# Altium PCB klor1_4.PcbDoc (part 2 of 3)
Units mm, origin at the board's own origin, x right, y up, seen from the top; angles counter-clockwise.
Board outline 323.11 x 118.19 mm, 2 copper layers (Top Layer, Bottom Layer); 176 components, 136 nets, 856 pads, 194 vias.
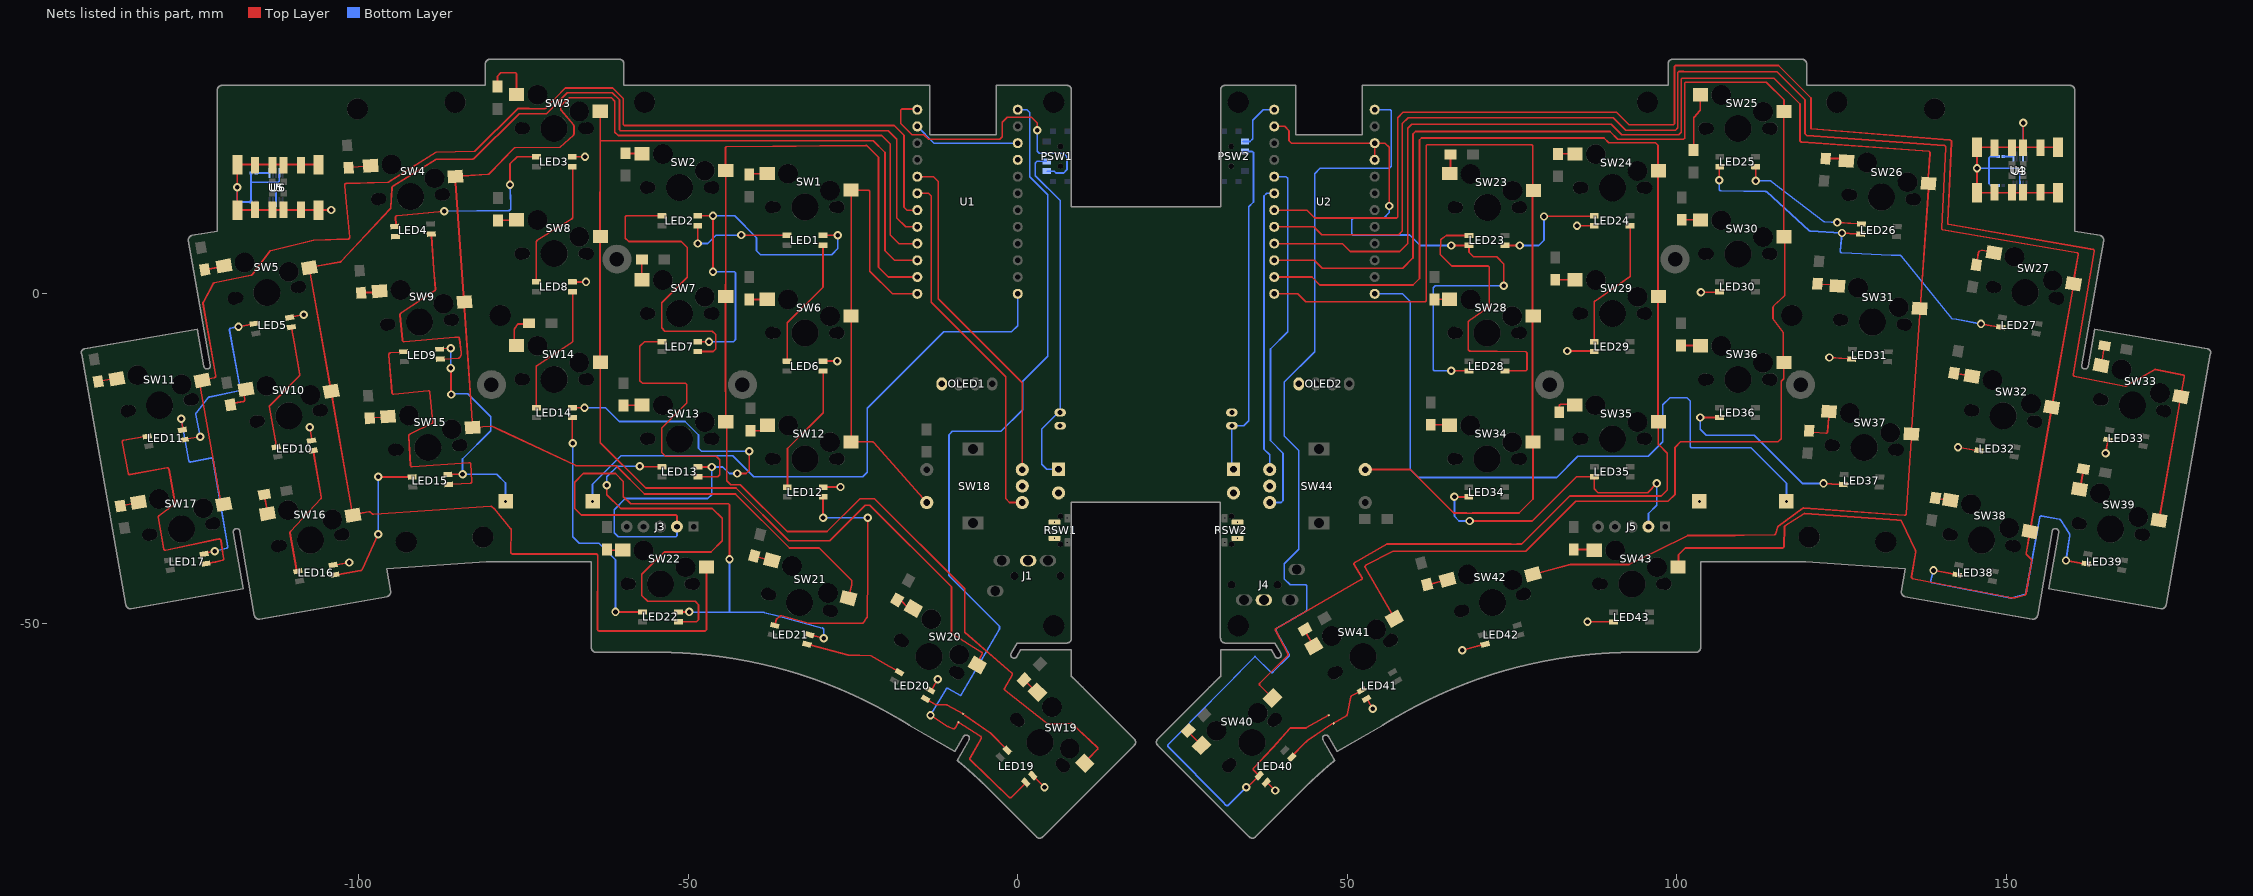
[diagram p2: the nets of this part, all layers, seen from the top]

## Via types
v1: diameter 1.27, hole 0.711, Top Layer to Bottom Layer, 194 vias

## Nets (pads, with @x,y where several pads share a name; then routed paths per layer and width w, separated by ;. In a path a pad name is that pad's centre, name@x,y a point inside that pad or via, vN(x,y) a via of type N, cw(c..) or ccw(c..) an arc to the next point about the centre after c; other vN are vias at no path point)
+BATT: PSW1.3 U1.24 | length 43.9
  Top Layer w0.254: U1.24@-15.24,27.94 -15.33,28.03 -17.591,28.03 -17.74,27.881 -17.74,25.83 -16.04,24.13 -14.24,24.13 -13.54,23.43 -2.74,23.43 -2.34,23.83 -2.34,26.03 -1.573,26.797 2.093,26.797 2.96,25.93 v1(2.96,24.83)
  Bottom Layer w0.254: v1(2.96,24.83) 2.96,21.63 3.26,21.33 6.96,21.33 7.46,20.83 7.46,18.83 6.96,18.33 5.808,18.33 5.534,18.604 PSW1.3@4.404,18.604
+BATT_L: PSW2.3 U2.24 | length 8.4
  Bottom Layer w0.254: PSW2.3@34.191,23.104 35.234,23.104 35.66,23.53 35.66,26.33 37.27,27.94 U2.24@38.92,27.94
AUDIO: BZ1.1 U1.12 | length 90.3
  Bottom Layer w0.254: BZ1.1@-64.515,-31.51 -64.515,-28.895 -60.19,-24.57 -43.24,-24.57 -40.04,-27.77 -23.54,-27.77 -22.84,-27.07 -22.84,-17.37 -11.24,-5.77 -0.94,-5.77 0,-4.83 U1.12@0,0
AUDIO_L: BZ2.1 U2.12 | length 109.5
  Bottom Layer w0.254: U2.12@54.16,0 58.39,0 59.56,-1.17 59.56,-26.67 60.76,-27.87 81.76,-27.87 84.96,-24.67 95.66,-24.67 97.873,-22.457 97.873,-16.857 98.96,-15.77 101.56,-15.77 102.052,-16.262 102.052,-23.229 102.201,-23.378 111.268,-23.378 116.635,-28.745 BZ2.1@116.635,-31.51
col0: SW11.1 SW17.1 U1.18 | length 175.1
  Top Layer w0.254: -123.625,-1.456 cw(c-123.375,-1.412) -123.599,-1.293 -122.096,1.525 cw(c-121.872,1.405) -121.923,1.654 -116.333,2.811 ccw(c-116.385,3.059) -116.183,2.906 -113.495,6.458 cw(c-113.292,6.304) -113.352,6.551 -106.865,8.124 ; -123.625,-1.456 -121.684,-12.42 cw(c-121.934,-12.464) -121.89,-12.714 ; -121.89,-12.714 -122.761,-12.868 SW11.1@-123.749,-13.154 -124.019,-14.088 -121.008,-31.162 SW17.1@-120.968,-31.425 ; -106.865,8.124 cw(c-106.805,7.877) -106.814,8.131 -101.61,8.32 ; -101.609,8.32 ccw(c-101.619,8.574) -101.366,8.599 -101.883,13.892 -102.139,16.417 cw(c-101.886,16.443) -102.14,16.443 -102.14,16.483 cw(c-101.886,16.483) -101.894,16.737 -95.511,16.928 -88.272,21.48 -82.484,21.643 -82.384,21.646 -75.874,28.057 -75.8,28.13 -74.14,28.13 -72.265,28.09 ; -72.264,28.091 -71.743,28.121 ; -71.742,28.121 ccw(c-71.757,28.374) -71.575,28.197 -68.64,31.236 -65.14,31.23 -61.44,31.23 -59.84,29.63 -59.84,25.679 -59.691,25.53 -18.74,25.53 -17.262,24.052 -17.262,13.152 -16.81,12.7 U1.18@-15.24,12.7
col0_L: SW33.1 SW39.1 U2.18 | length 229.7
  Top Layer w0.254: U2.18@38.92,12.7 43.89,12.7 45.086,11.504 57.511,11.504 57.66,11.653 57.66,26.73 58.46,27.53 90.86,27.53 92.76,25.63 99.511,25.63 99.66,25.779 99.66,34.481 99.809,34.63 115.432,34.63 120.36,29.702 120.36,25.064 141.445,23.331 141.538,23.324 141.678,23.183 141.678,23.072 141.088,10.79 141.088,10.783 141.088,10.778 141.088,10.672 141.163,10.598 141.219,10.541 163.213,6.734 163.344,6.603 163.344,6.476 163.341,6.455 160.157,-12.25 160.157,-12.376 160.286,-12.505 167.972,-14.025 167.997,-14.025 168.064,-14.025 168.122,-13.991 172.478,-11.517 cw(c172.603,-11.738) 172.652,-11.488 ; 172.653,-11.489 176.817,-12.321 cw(c176.767,-12.57) 177.017,-12.614 ; SW39.1@173.177,-34.385 173.327,-33.525 176.337,-16.45 SW33.1@176.457,-15.585 176.644,-14.731 177.017,-12.614
col1: SW5.1 SW10.1 SW16.1 SW22.1 U1.17 | length 240.8
  Top Layer w0.254: -102.823,4.815 -106.493,4.168 SW5.1@-107.489,3.926 -107.35,3.064 -104.215,-14.717 -101.031,-32.774 SW16.1@-100.879,-33.634 -99.892,-33.344 -98.453,-33.09 cw(c-98.409,-33.34) -98.25,-33.142 -97.917,-33.408 ccw(c-97.759,-33.21) -97.741,-33.463 -79.986,-32.222 ; -102.823,4.815 ccw(c-102.868,5.065) -102.683,4.891 -95.192,12.895 ; -95.192,12.896 ccw(c-95.378,13.069) -95.124,13.054 -94.947,16.107 cw(c-94.694,16.092) -94.839,16.301 -88.24,20.43 -82.744,20.43 ccw(c-82.744,20.684) -82.566,20.503 -75.634,27.33 -71.496,27.33 -71.422,27.404 ccw(c-71.602,27.584) -71.421,27.405 -68.455,30.453 cw(c-68.273,30.276) -68.453,30.456 -68.378,30.53 -61.54,30.53 -60.44,29.43 -60.44,24.879 -60.291,24.73 -19.64,24.73 -18.34,23.43 -18.34,11.49 -17.01,10.16 U1.17@-15.24,10.16 ; -79.986,-32.222 cw(c-79.969,-32.475) -79.806,-32.28 -79.432,-32.591 -76.9,-35.697 cw(c-77.096,-35.857) -76.843,-35.863 -76.933,-39.209 ccw(c-76.679,-39.216) -76.679,-39.47 -63.994,-39.47 ; -63.994,-39.47 cw(c-63.994,-39.724) -63.74,-39.724 -63.76,-50.465 ; -63.76,-50.47 -63.755,-50.918 -63.755,-50.97 ccw(c-63.506,-50.918) -63.561,-51.166 -47.436,-51.166 -47.239,-50.969 SW22.1@-47.239,-41.436
col1_L: SW27.1 SW32.1 SW38.1 SW43.1 U2.17 | length 289
  Top Layer w0.254: U2.17@38.92,10.16 44.93,10.16 46.126,8.964 57.794,8.964 58.36,9.53 58.36,25.83 59.26,26.73 90.36,26.73 92.26,24.83 99.811,24.83 100.168,25.187 100.168,33.581 100.317,33.73 101.06,33.73 115.241,33.649 119.46,29.43 119.46,24.292 119.589,24.163 119.731,24.022 140.563,22.505 140.658,22.498 140.799,22.357 140.799,22.245 140.194,9.968 140.193,9.962 140.193,9.851 140.325,9.719 160.783,6.233 160.915,6.102 160.915,5.974 160.911,5.953 160.279,2.367 SW27.1@160.197,1.495 160.057,0.633 156.928,-17.114 154.342,-31.778 154.341,-31.784 153.738,-35.205 SW38.1@153.587,-36.065 153.435,-36.924 153.001,-39.384 153.001,-39.511 153.768,-40.278 cw(c153.588,-40.457) 153.838,-40.498 152.987,-45.511 cw(c152.737,-45.468) 152.806,-45.713 ; SW43.1@100.165,-41.41 100.26,-40.537 100.26,-39.57 101.26,-38.57 116.012,-38.57 ccw(c116.012,-38.316) 116.266,-38.323 ; 116.266,-38.323 116.341,-35.392 116.344,-35.291 116.435,-35.2 119.277,-33.384 119.34,-33.344 119.423,-33.344 133.357,-34.316 134.057,-34.365 136.226,-38.998 cw(c135.996,-39.106) 136.247,-39.148 135.602,-42.926 ; 135.602,-42.927 ccw(c135.852,-42.968) 135.803,-43.218 150.351,-46.068 ; 150.352,-46.069 ccw(c150.4,-45.819) 150.369,-46.071 151.11,-46.164 ccw(c151.141,-45.912) 151.208,-46.157 152.805,-45.713
col2: SW4.1 SW9.1 SW15.1 SW21.1 U1.16 | length 207
  Top Layer w0.254: -68.113,29.663 -69.258,28.605 ccw(c-69.086,28.419) -69.34,28.419 -69.34,28.022 ccw(c-69.086,28.022) -69.281,27.859 -67.399,25.601 cw(c-67.594,25.438) -67.34,25.438 -67.34,24.242 cw(c-67.594,24.242) -67.422,24.055 ; -68.113,29.663 cw(c-67.941,29.476) -67.941,29.73 -61.64,29.73 -61.14,29.23 -61.14,24.53 -60.64,24.03 -20.64,24.03 -19.34,22.73 -19.34,8.93 -18.03,7.62 U1.16@-15.24,7.62 ; -67.423,24.054 -69.441,22.217 -76.254,22.169 -76.358,22.168 -76.433,22.093 -80.214,18.216 -80.282,18.148 -80.377,18.141 -84.317,17.866 SW4.1@-85.337,17.792 -85.302,16.919 -84.034,-1.224 -82.762,-19.407 SW15.1@-82.702,-20.278 -81.198,-20.173 -79.877,-20.08 -79.81,-20.08 -79.758,-20.105 -78.586,-20.668 -67.112,-26.01 -67.052,-26.07 -60.94,-26.07 -56.64,-30.37 -42.84,-30.37 -34.64,-38.57 -30.14,-38.57 -25.205,-43.505 -25.205,-44.179 -25.513,-45.328 SW21.1@-25.706,-46.18
col2_L: SW26.1 SW31.1 SW37.1 SW42.1 U2.16 | length 249.5
  Top Layer w0.254: U2.16@38.92,7.62 49.27,7.62 50.466,6.424 57.954,6.424 59.16,7.63 59.16,25.13 59.76,25.73 90.06,25.73 91.66,24.13 100.311,24.13 100.676,24.495 100.676,32.581 100.825,32.73 114.76,32.73 118.701,28.789 118.701,23.172 118.843,23.031 118.937,23.024 138.279,21.616 138.42,21.474 138.42,21.36 138.42,21.351 138.16,17.634 SW26.1@138.208,16.755 138.184,15.882 136.92,-2.195 135.964,-15.858 135.648,-20.384 SW37.1@135.588,-21.255 135.597,-22.13 134.811,-33.376 134.804,-33.471 134.663,-33.613 134.548,-33.613 119.277,-32.506 119.185,-32.506 119.118,-32.555 115.399,-35.262 115.34,-35.321 115.322,-35.381 115.014,-36.394 cw(c114.771,-36.319) 114.776,-36.573 ; SW42.1@78.149,-42.556 79.148,-42.333 83.828,-41.079 ; 83.829,-41.078 cw(c83.893,-41.324) 83.893,-41.07 92.701,-41.07 ; 92.702,-41.07 ccw(c92.701,-40.816) 92.813,-41.044 101.607,-36.696 ; 101.608,-36.696 cw(c101.719,-36.924) 101.719,-36.67 108.86,-36.67 110.116,-36.649 110.219,-36.648 114.775,-36.573
col3: SW3.1 SW8.1 SW14.1 SW20.1 U1.15 | length 196.2
  Top Layer w0.254: SW3.1@-63.345,27.69 -63.34,27.685 -63.34,23.23 ; U1.15@-15.24,5.08 -15.39,5.23 -15.54,5.08 -18.69,5.08 -20.14,6.53 -20.14,21.43 -21.94,23.23 -63.34,23.23 ; SW20.1@-6.111,-56.314 -5.86,-55.45 -5.386,-54.629 -5.386,-54.455 -5.481,-54.36 -9.964,-51.601 -9.986,-51.58 -10.06,-51.506 -10.06,-44.49 -10.04,-44.47 -22.44,-32.07 -23.14,-32.07 -28.54,-37.47 -34.74,-37.47 -42.74,-29.47 -56.44,-29.47 -63.331,-22.579 SW14.1@-63.331,-10.388 -63.396,-10.323 -63.396,8.685 -63.396,15.476 -63.34,15.532 -63.34,23.23
col3_L: SW25.1 SW30.1 SW36.1 SW41.1 U2.15 | length 244.5
  Top Layer w0.254: U2.15@38.92,5.08 45.01,5.08 46.206,3.884 58.414,3.884 59.96,5.43 59.96,24.23 60.36,24.63 89.86,24.63 91.06,23.43 101.011,23.43 101.184,23.603 101.184,31.946 101.333,32.095 113.595,32.095 116.26,29.43 116.26,28.563 116.265,27.69 116.251,27.676 116.251,8.685 116.36,7.812 116.36,-0.265 116.286,-0.34 116.283,-0.343 114.687,-1.845 114.611,-1.92 114.61,-2.024 114.589,-3.639 114.589,-3.641 114.589,-3.725 116.112,-5.827 116.16,-5.894 116.16,-9.515 116.251,-10.388 116.251,-12.879 115.86,-13.27 115.86,-21.972 115.367,-22.465 100.565,-22.465 99.74,-23.29 99.74,-30.39 98.66,-31.47 84.66,-31.47 77.06,-39.07 56.93,-39.07 52.798,-41.216 52.696,-41.318 52.696,-41.491 52.73,-41.55 56.762,-48.533 SW41.1@57.155,-49.314
col4: SW2.1 SW7.1 SW13.1 SW19.1 U1.14 | length 184.3
  Top Layer w0.254: U1.14@-15.24,2.54 -19.65,2.54 -21.14,4.03 -21.14,20.73 -22.916,22.506 -23.022,22.506 -44.192,22.337 -44.266,22.263 -44.34,22.189 -44.34,19.583 SW2.1@-44.305,18.71 -44.305,1.509 -44.346,1.468 -44.346,-14.859 -44.305,-14.9 -44.305,-19.424 SW13.1@-44.302,-19.426 -44.14,-20.299 -44.14,-28.37 -43.548,-28.962 -42.085,-28.962 -34.977,-36.07 -28.94,-36.07 -23.945,-31.075 -21.735,-31.075 -8.04,-44.77 -8.04,-51.356 -0.899,-57.532 cw(c-1.065,-57.724) -0.846,-57.852 -1.987,-59.812 -2.021,-59.871 -2.021,-60.045 -1.936,-60.13 4.498,-65.228 4.567,-65.283 4.656,-65.283 4.66,-65.283 4.664,-65.283 8.056,-65.173 cw(c8.064,-65.427) 8.237,-65.241 12.066,-68.791 cw(c11.894,-68.977) 12.074,-69.156 ; SW19.1@10.159,-71.225 10.699,-70.531 12.073,-69.157
col4_L: SW24.1 SW29.1 SW35.1 SW40.1 U2.14 | length 217.1
  Top Layer w0.254: SW40.1@38.66,-61.326 36.687,-59.353 36.687,-59.143 40.957,-54.873 41,-54.83 41,-54.572 39.119,-51.129 39.088,-51.072 39.088,-51.008 39.088,-50.902 39.163,-50.828 ; U2.14@38.92,2.54 44.65,2.54 45.846,1.344 59.974,1.344 60.96,2.33 60.96,23.33 61.26,23.63 88.952,23.63 89.66,22.922 96.768,22.922 97.16,22.53 97.16,19.175 96.96,18.975 97.225,18.71 97.154,17.837 97.154,5.26 97.154,-18.515 97.201,-19.388 97.201,-22.87 97.26,-22.87 98.56,-24.17 98.56,-29.77 97.66,-30.67 83.76,-30.67 76.46,-37.97 75.76,-37.97 75.744,-37.986 74.902,-37.986 74.886,-37.97 55.971,-37.97 51.118,-40.775 51.02,-40.873 51.02,-41.05 51.058,-41.112 52.228,-43.008 52.266,-43.069 52.266,-43.141 52.266,-43.246 52.192,-43.321 ; 39.163,-50.828 39.186,-50.804 52.168,-43.345 52.191,-43.321
col5: SW1.1 SW6.1 SW12.1 SW18.S1 U1.13 | length 77.5
  Top Layer w0.254: U1.13@-15.24,0 -19.01,0 -22.44,3.43 -22.44,15.581 -22.589,15.73 SW1.1@-25.305,15.73 -25.286,15.711 SW12.1@-25.286,-22.478 -24.263,-22.47 -22.055,-22.47 cw(c-22.055,-22.724) -21.865,-22.555 SW18.S1@-13.81,-31.67
col5_L: SW23.1 SW28.1 SW34.1 SW44.S1 U2.13 | length 146.4
  Top Layer w0.254: U2.13@38.92,0 42.49,0 43.686,-1.196 61.811,-1.196 61.96,-1.047 61.96,22.481 62.109,22.63 78.011,22.63 78.16,22.481 78.16,15.795 78.225,15.73 78.104,14.857 78.104,-3.325 78.104,-13.79 78.104,-21.567 78.185,-22.44 78.185,-31.145 76.06,-33.27 68.997,-33.27 68.981,-33.286 68.139,-33.286 68.123,-33.27 66.16,-33.27 59.56,-26.67 53.13,-26.67 52.93,-26.87 SW44.S1@52.73,-26.67
ENCA: SW18.A U1.20 | length 52.5
  Top Layer w0.254: U1.20@-15.24,17.78 -12.79,17.78 -12.04,17.03 -12.04,-0.77 0.69,-13.5 SW18.A@0.69,-26.67
ENCA_L: SW44.A U2.20 | length 55.1
  Bottom Layer w0.254: SW44.A@38.23,-31.67 39.96,-31.67 40.26,-31.37 40.26,-24.17 38.36,-22.27 38.36,-8.37 40.96,-5.77 40.96,17.53 40.71,17.78 U2.20@38.92,17.78
ENCB: SW18.B U1.19 | length 55.6
  Top Layer w0.254: U1.19@-15.24,15.24 -13.54,15.24 -13.14,14.84 -13.14,-1.27 -1.84,-12.57 -1.84,-31.07 -1.24,-31.67 SW18.B@0.69,-31.67
ENCB_L: SW44.B U2.19 | length 43.6
  Bottom Layer w0.254: SW44.B@38.23,-26.67 38.23,-24.44 37.36,-23.57 37.36,14.83 37.77,15.24 U2.19@38.92,15.24
GND_l: BT3.2 BT4.2 BZ2.2 C1.2 C2.2 J4.2 J5.2 LED23.2 LED24.2 LED25.2 LED26.2 LED27.2 LED28.2 LED29.2 LED30.2 LED31.2 LED32.2 LED33.2 LED34.2 LED35.2 LED36.2 LED37.2 LED38.2 LED39.2 LED40.2 LED41.2 LED42.2 LED43.2 OLED2.1 RSW2.1 SW44.C U2.3 U2.4 U2.23 U3.4 U3.8 U4.5 U4.6 U4.7 U4.8 U4.9 U4.10 U4.11 U4.12 U4.13 U4.14 U4.15 U4.16 | length 366.2
  Top Layer w0.254: LED40.2@37.696,-74.146 37.966,-74.276 v1(39.06,-75.37) ; U2.23@38.92,25.4 40.49,25.4 41.16,24.73 41.16,23.23 41.53,22.86 U2.3@54.16,22.86 ; LED41.2@52.905,-61.447 53.103,-61.66 v1(53.86,-62.97) ; U2.4@54.16,20.32 U2.3@54.16,22.86 ; v1(56.36,13.33) 56.36,22.23 55.73,22.86 U2.3@54.16,22.86 ; v1(65.76,-11.67) 67.907,-11.67 LED28.2@68.455,-11.708 ; v1(65.76,7.33) 67.93,7.33 LED23.2@68.478,7.347 68.478,6.312 69.16,5.63 72.66,5.63 73.76,4.53 v1(73.76,1.23) ; v1(66.26,-30.77) 66.313,-30.823 LED34.2@68.438,-30.823 ; v1(67.46,-54.07) 70.38,-53.288 LED42.2@70.915,-53.166 ; v1(68.56,-34.47) 78.06,-34.47 84.785,-27.745 LED35.2@87.485,-27.745 87.485,-29.595 88.052,-30.162 95.568,-30.162 v1(96.96,-28.77) ; v1(83.36,-8.67) 86.92,-8.67 LED29.2@87.468,-8.753 ; v1(84.86,10.33) 86.93,10.33 LED24.2@87.478,10.327 ; v1(86.46,-49.77) 89.87,-49.77 LED43.2@90.418,-49.793 ; v1(103.56,-18.77) 105.956,-18.77 LED36.2@106.504,-18.771 ; v1(103.66,0.23) 105.956,0.23 LED30.2@106.504,0.302 ; v1(106.46,17.23) 106.46,19.024 LED25.2@106.518,19.307 ; v1(122.26,-28.77) 124.73,-28.943 LED37.2@125.28,-28.937 ; v1(123.16,-9.67) 125.993,-9.868 LED31.2@126.54,-9.907 ; v1(125.06,9.23) 127.35,9.07 LED26.2@127.9,9.073 ; v1(138.96,-41.97) 141.997,-42.506 LED38.2@142.532,-42.628 ; v1(142.66,-23.27) 145.269,-23.73 LED32.2@145.819,-23.765 ; v1(146.16,-4.57) 148.598,-5 LED27.2@149.142,-5.068 ; U4.14@152.56,22.13 U4.14@152.56,22.23 ; v1(152.56,25.93) U4.14@152.56,22.23 ; U4.5@157.86,15.33 U4.10@145.56,15.33 v1(145.56,19.03) U4.11@145.56,22.23 U4.14@152.56,22.23 ; U4.16@157.86,22.23 U4.14@152.56,22.23 ; v1(159.06,-40.47) 161.572,-40.913 LED39.2@162.122,-40.948 ; v1(165.06,-24.17) 165.367,-22.429 LED33.2@165.402,-22.148
  Bottom Layer w0.254: v1(56.36,13.33) 56.36,12.33 55.51,11.48 50.91,11.48 50.66,11.23 50.66,9.13 50.86,8.93 59.46,8.93 61.06,7.33 v1(65.76,7.33) ; v1(65.76,-11.67) 63.209,-11.67 63.06,-11.521 63.06,0.93 63.355,1.225 73.755,1.225 v1(73.76,1.23) ; v1(66.26,-30.77) 66.26,-33.77 66.96,-34.47 v1(68.56,-34.47) ; J5.2@95.7,-35.32 95.7,-33.33 96.96,-32.07 v1(96.96,-28.77) ; v1(103.56,-18.77) 103.56,-20.57 104.46,-21.47 111.76,-21.47 119.06,-28.77 v1(122.26,-28.77) ; v1(106.46,17.23) 106.46,15.779 106.609,15.63 106.71,15.628 113.464,15.532 cw(c113.46,15.278) 113.631,15.466 120.094,9.59 ccw(c120.265,9.778) 120.249,9.525 v1(125.06,9.23) 124.787,6.496 ccw(c125.039,6.471) 125.026,6.217 ; 125.027,6.217 132.561,5.858 133.842,5.832 cw(c133.837,5.578) 134.034,5.739 141.764,-3.785 142.438,-3.884 v1(146.16,-4.57) ; 138.533,-43.506 ccw(c138.778,-43.573) 138.73,-43.823 150.702,-46.159 ccw(c150.75,-45.909) 150.817,-46.154 152.805,-45.612 ; 138.534,-43.505 v1(138.96,-41.97) ; v1(145.56,19.03) 147.26,19.03 ; C2.2@148.76,16.43 147.66,16.43 147.36,16.73 147.36,18.93 ; C1.2@148.76,20.83 147.56,20.83 147.36,20.63 147.36,18.93 ; U3.8@152.06,16.43 152.06,18.73 151.76,19.03 147.26,19.03 ; v1(152.56,25.93) 152.576,25.914 U3.4@152.576,21.33 ; 152.806,-45.612 ccw(c152.738,-45.367) 152.988,-45.413 155.057,-33.931 155.071,-33.853 155.202,-33.722 155.33,-33.722 158.057,-34.225 158.135,-34.239 158.191,-34.295 158.21,-34.314 158.225,-34.337 159.608,-36.489 cw(c159.394,-36.626) 159.645,-36.664 v1(159.06,-40.47) ; 147.26,19.03 147.36,18.93
GND_R: BT1.2 BT2.2 BZ1.2 C3.2 C4.2 J1.2 J3.2 LED1.2 LED2.2 LED3.2 LED4.2 LED5.2 LED6.2 LED7.2 LED8.2 LED9.2 LED10.2 LED11.2 LED12.2 LED13.2 LED14.2 LED15.2 LED16.2 LED17.2 LED19.2 LED20.2 LED21.2 LED22.2 OLED1.1 RSW1.1 SW18.C U1.3 U1.4 U1.23 U5.4 U5.8 U6.5 U6.6 U6.7 U6.8 U6.9 U6.10 U6.11 U6.12 U6.13 U6.14 U6.15 U6.16 | length 380.6
  Top Layer w0.254: v1(-126.94,-18.97) -126.692,-20.374 LED11.2@-126.743,-20.67 ; LED17.2@-123.463,-39.47 -122.943,-39.264 v1(-121.84,-39.07) ; LED5.2@-110.483,-3.59 -109.95,-3.454 v1(-108.34,-3.17) ; v1(-107.44,-20.27) -107.136,-21.996 LED10.2@-107.16,-22.288 ; U6.16@-106.111,19.618 -118.411,19.618 v1(-118.411,16.168) -118.411,12.718 -106.111,12.718 v1(-104.152,12.718) ; LED16.2@-103.873,-41.15 -103.325,-41.102 v1(-101.44,-40.77) ; LED9.2@-87.725,-8.411 -87.18,-8.35 v1(-86.04,-8.27) ; LED15.2@-86.465,-27.441 -86.394,-27.37 v1(-84.24,-27.37) ; v1(-86.04,-11.27) -85.99,-11.32 -85.99,-15.22 v1(-85.94,-15.27) ; LED3.2@-67.598,20.807 v1(-65.663,20.807) ; LED14.2@-67.584,-17.271 v1(-65.741,-17.271) ; LED8.2@-67.584,1.802 v1(-65.512,1.802) ; J3.2@-51.71,-35.32 -51.71,-33.719 -51.859,-33.57 -66.24,-33.57 -67.24,-32.57 -67.24,-28.57 -65.94,-27.27 -61.04,-27.27 -59.84,-28.47 -59.84,-30.77 -58.74,-31.87 -43.889,-31.87 -43.74,-32.019 v1(-43.74,-40.27) ; LED22.2@-51.472,-48.28 -49.85,-48.28 v1(-49.84,-48.27) ; LED2.2@-48.558,11.827 -48.545,11.841 -46.251,11.841 v1(-46.237,11.854) -46.237,3.333 v1(-46.24,3.33) ; LED7.2@-48.548,-7.253 -48.54,-7.261 -48.536,-7.257 -46.86,-7.257 v1(-46.856,-7.261) ; LED13.2@-48.534,-26.271 v1(-46.44,-26.27) ; v1(-42.54,-27.27) -41.24,-27.27 -40.74,-26.77 v1(-40.74,-23.87) ; LED21.2@-31.595,-51.727 -31.057,-51.837 v1(-29.44,-52.27) ; LED1.2@-29.537,8.886 v1(-27.296,8.886) ; LED6.2@-29.535,-10.208 v1(-27.402,-10.208) ; LED12.2@-29.518,-29.323 v1(-26.887,-29.323) ; LED20.2@-13.235,-60.148 -12.999,-59.958 v1(-12.14,-58.47) ; LED19.2@2.285,-73.085 2.667,-73.477 v1(4.06,-74.87)
  Bottom Layer w0.254: v1(-126.94,-18.97) -125.786,-25.317 ccw(c-125.536,-25.272) -125.488,-25.521 ; -125.488,-25.521 -122.396,-24.92 cw(c-122.347,-25.169) -122.097,-25.126 ; -122.097,-25.127 -119.879,-38.338 cw(c-120.129,-38.381) -120.067,-38.627 ; v1(-121.84,-39.07) -120.068,-38.627 ; v1(-118.411,16.168) -118.411,14.079 -118.262,13.93 C4.2@-116.34,13.93 -116.34,16.93 ; C3.2@-116.34,18.33 -116.34,16.93 ; U5.8@-112.54,13.93 -112.54,16.93 ; U5.4@-112.04,18.168 -112.04,17.079 -112.189,16.93 -112.54,16.93 ; v1(-86.04,-11.27) v1(-86.04,-8.27) ; v1(-85.94,-15.27) -85.84,-15.17 -83.44,-15.17 -79.94,-18.67 -79.94,-20.77 -84.24,-25.07 v1(-84.24,-27.37) -79.04,-27.37 -77.715,-28.695 BZ1.2@-77.715,-31.51 ; v1(-65.741,-17.271) -62.541,-17.271 -60.441,-19.37 -50.501,-19.37 -48.44,-21.431 -48.44,-23.421 -47.991,-23.87 v1(-40.74,-23.87) ; J3.2@-51.71,-35.32 -51.71,-36.721 -51.859,-36.87 -60.64,-36.87 -61.24,-36.27 -61.24,-32.755 -59.547,-31.062 -47.032,-31.062 -46.44,-30.47 v1(-46.44,-26.27) -44.74,-26.27 -43.74,-27.27 v1(-42.54,-27.27) ; v1(-49.84,-48.27) -44.34,-48.318 -43.74,-48.324 ; v1(-46.856,-7.261) -43.131,-7.261 -42.84,-6.97 -42.84,3.181 -42.989,3.33 v1(-46.24,3.33) ; v1(-46.237,11.854) -45.14,11.83 -42.94,11.83 -39.64,8.53 -39.64,6.53 -39.04,5.93 -28.24,5.93 -27.296,6.874 v1(-27.296,8.886) ; v1(-43.74,-40.27) -43.74,-48.324 ; v1(-29.44,-52.27) -29.44,-50.965 ccw(c-29.694,-50.965) -29.628,-50.72 -36.539,-48.87 -38.409,-48.378 ccw(c-38.474,-48.624) -38.472,-48.37 -43.74,-48.324 ; U1.23@-15.24,25.4 -12.7,22.86 U1.3@0,22.86 ; -116.34,16.93 -112.54,16.93
LED: JP26.2 LED19.3 U1.1 | length 139.2
  Top Layer w0.254: v1(-13.24,-63.97) -10.555,-65.66 ; -10.555,-65.661 ccw(c-10.42,-65.445) -10.523,-65.677 -9.842,-65.98 ccw(c-9.739,-65.748) -9.519,-65.875 -9.022,-65.013 -8.994,-65.029 -5.646,-67.14 cw(c-5.782,-67.355) -5.561,-67.481 -7.241,-70.398 ; -7.242,-70.399 ccw(c-7.021,-70.525) -7.197,-70.708 -1.44,-76.27 -1.32,-76.39 ccw(c-1.14,-76.211) -0.961,-76.391 ; -0.96,-76.39 1.054,-74.376 LED19.3@1.224,-74.146
  Bottom Layer w0.254: v1(-13.24,-63.97) -10.868,-59.984 cw(c-10.649,-60.114) -10.523,-59.894 -8.641,-60.969 -2.802,-50.944 -2.767,-50.885 -2.767,-50.443 -10.44,-42.77 -10.44,-21.37 -10.366,-21.296 -9.94,-20.87 -2.54,-20.87 0.76,-17.57 0.76,-13.27 4.56,-9.47 4.56,15.03 1.844,17.746 1.844,27.507 1.411,27.94 U1.1@0,27.94
LED_L: JP29.2 LED40.3 U2.1 | length 167.9
  Top Layer w0.254: v1(34.66,-74.87) 34.85,-74.87 LED40.3@36.635,-73.085 36.575,-73.085 35.718,-72.228 35.718,-72.022 38.791,-68.792 ; 38.787,-68.796 41.284,-65.956 cw(c41.475,-66.124) 41.475,-65.87 43.762,-65.873 ; 43.763,-65.872 47.177,-63.953 JP29.2@47.198,-63.942
  Bottom Layer w0.254: 22.835,-68.392 ccw(c23.017,-68.57) 22.836,-68.748 31.162,-77.168 31.58,-77.589 ccw(c31.761,-77.41) 31.94,-77.59 ; 22.836,-68.391 35.997,-55.027 38.38,-57.392 ccw(c38.559,-57.211) 38.738,-57.392 41.125,-55.005 ccw(c40.946,-54.825) 41.168,-54.703 39.182,-51.092 cw(c39.404,-50.969) 39.28,-50.748 39.281,-50.747 39.96,-50.37 43.735,-48.144 ccw(c43.606,-47.925) 43.86,-47.925 43.86,-44.319 43.711,-44.17 41.36,-44.17 40.46,-43.27 40.46,-40.97 42.66,-38.77 42.66,-23.77 40.46,-21.57 40.46,-13.37 45.06,-8.77 45.06,18.23 45.86,19.03 56.36,19.03 56.66,19.33 56.66,27.791 56.511,27.94 U2.1@54.16,27.94 ; 31.94,-77.59 v1(34.66,-74.87)
NetBT1_1: BT1.1 BT2.1 PSW1.2 | length 53.3
  Bottom Layer w0.254: PSW1.2@4.404,20.104 2.934,20.104 2.66,19.83 2.66,17.93 6.43,14.16 BT1.1@6.43,-18.02 6.155,-18.02 3.66,-20.515 3.66,-25.87 4.41,-26.62 BT2.1@6.185,-26.62
NetBT3_1: BT3.1 BT4.1 PSW2.2 | length 52.1
  Bottom Layer w0.254: BT4.1@32.735,-26.62 32.49,-25.747 BT3.1@32.49,-20.02 34.31,-20.02 35.06,-19.27 35.06,13.23 35.76,13.93 35.76,21.43 35.586,21.604 PSW2.2@34.191,21.604
NetC1_1: C1.1 U3.1 | length 1.4
  Bottom Layer w0.254: C1.1@149.56,20.83 U3.1@150.998,20.83
NetC3_1: C3.1 U5.1 | length 2
  Bottom Layer w0.254: C3.1@-115.54,18.33 U5.1@-113.54,18.33
NetD1_2: D1.2 SW1.2 | length 2.7
  Top Layer w0.254: D1.2@-40.74,18.23 -40.117,18.239 -39.028,18.239 SW1.2@-38.005,18.27
NetD2_2: D2.2 SW2.2 | length 2.5
  Top Layer w0.254: D2.2@-59.54,21.33 -58.917,21.282 -58.028,21.282 SW2.2@-57.005,21.25
NetD3_2: D3.2 SW3.2 | length 7.9
  Top Layer w0.254: D3.2@-78.94,31.43 -78.94,33.03 -78.44,33.53 -76.194,33.53 -76.045,33.381 SW3.2@-76.045,30.23
NetD4_2: D4.2 SW4.2 | length 3.4
  Top Layer w0.254: D4.2@-101.521,19.134 -100.903,19.228 -99.202,19.347 SW4.2@-98.183,19.44
NetD5_2: D5.2 SW5.2 | length 3
  Top Layer w0.254: D5.2@-123.345,3.656 -122.733,3.775 -121.438,4.003 SW5.2@-120.437,4.222
NetD6_2: D6.2 SW6.2 | length 2.8
  Top Layer w0.254: D6.2@-40.74,-0.87 -38.05,-0.87 SW6.2@-38.003,-0.823
NetD7_2: D7.2 SW7.2 | length 3.1
  Top Layer w0.254: D7.2@-57.04,5.23 -57.04,2.156 SW7.2@-57.016,2.132
NetD8_2: D8.2 SW8.2 | length 2.8
  Top Layer w0.254: D8.2@-78.84,11.13 -78.217,11.151 -77.054,11.151 SW8.2@-76.031,11.225
NetD9_2: D9.2 SW9.2 | length 2.9
  Top Layer w0.254: D9.2@-99.621,0.134 -99.545,0.21 -96.998,0.21 SW9.2@-96.808,0.4
NetD10_2: D10.2 SW10.2 | length 4.1
  Top Layer w0.254: D10.2@-119.445,-16.844 -118.86,-16.575 -117.487,-16.333 ccw(c-117.531,-16.083) -117.281,-16.04 ; -117.281,-16.039 -117.392,-15.41 SW10.2@-117.115,-14.475
NetD11_2: D11.2 SW11.2 | length 2.9
  Top Layer w0.254: D11.2@-139.535,-13.296 -138.919,-13.201 -137.713,-12.988 SW11.2@-136.697,-12.858
NetD12_2: D12.2 SW12.2 | length 2.9
  Top Layer w0.254: D12.2@-40.54,-20.77 -38.818,-20.77 SW12.2@-37.986,-19.938
NetD13_2: D13.2 SW13.2 | length 2.9
  Top Layer w0.254: D13.2@-59.84,-16.97 -59.756,-16.886 SW13.2@-57.002,-16.886
NetD14_2: D14.2 SW14.2 | length 5.2
  Top Layer w0.254: SW14.2@-76.421,-7.888 -76.421,-5.442 -76.379,-5.378 -75.84,-4.57 -74.913,-4.57 D14.2@-74.14,-4.47
NetD15_2: D15.2 SW15.2 | length 2.8
  Top Layer w0.254: D15.2@-98.321,-18.866 -97.701,-18.813 -96.567,-18.734 SW15.2@-95.548,-18.63
NetD16_2: D16.2 SW16.2 | length 2.9
  Top Layer w0.254: D16.2@-114.314,-30.465 -114.219,-31.081 -113.973,-32.477 SW16.2@-113.827,-33.338
NetD17_2: D17.2 SW17.2 | length 2.8
  Top Layer w0.254: D17.2@-136.135,-32.196 -135.524,-32.075 -134.417,-31.88 SW17.2@-133.417,-31.658
NetD19_2: D19.2 SW19.2 | length 2.8
  Top Layer w0.254: D19.2@0.958,-58.572 2.835,-60.449 SW19.2@2.975,-60.449
NetD20_2: D20.2 SW20.2 | length 3
  Top Layer w0.254: D20.2@-18.29,-46.442 -17.83,-46.442 -16.509,-47.764 SW20.2@-15.839,-47.764
NetD21_2: D21.2 SW21.2 | length 2.7
  Top Layer w0.254: D21.2@-39.98,-39.812 -39.373,-39.955 -38.321,-40.237 SW21.2@-37.316,-40.439
NetD22_2: D22.2 SW22.2 | length 2.5
  Top Layer w0.254: D22.2@-62.34,-38.77 -62.214,-38.896 SW22.2@-59.939,-38.896
NetD23_2: D23.2 SW23.2 | length 2.9
  Top Layer w0.254: SW23.2@65.525,18.27 65.66,18.405 D23.2@65.66,21.13
NetD24_2: D24.2 SW24.2 | length 2.6
  Top Layer w0.254: D24.2@81.96,21.23 81.98,21.25 SW24.2@84.525,21.25
NetD25_2: D25.2 SW25.2 | length 8.8
  Top Layer w0.254: D25.2@102.56,21.83 102.56,26.632 cw(c102.814,26.632) 102.626,26.803 103.494,27.758 ; 103.495,27.758 ccw(c103.306,27.928) 103.56,27.927 103.56,29.357 SW25.2@103.565,30.23
NetD26_2: D26.2 SW26.2 | length 3.3
  Top Layer w0.254: D26.2@122.579,20.526 125.365,20.526 cw(c125.365,20.175) SW26.2@125.716,20.175
NetD27_2: D27.2 SW27.2 | length 4.4
  Top Layer w0.254: D27.2@145.455,4.404 145.589,5.165 145.789,6.295 145.802,6.374 145.898,6.469 146.268,6.608 146.336,6.608 146.358,6.604 147.139,6.467 SW27.2@148.131,6.202
NetD28_2: D28.2 SW28.2 | length 2.2
  Top Layer w0.254: D28.2@63.26,-0.87 63.883,-0.846 64.479,-0.846 SW28.2@65.502,-0.785
NetD29_2: D29.2 SW29.2 | length 3
  Top Layer w0.254: D29.2@81.56,2.13 82.183,2.138 83.492,2.138 SW29.2@84.515,2.17
NetD30_2: D30.2 SW30.2 | length 2.8
  Top Layer w0.254: D30.2@100.76,11.23 101.383,11.227 102.528,11.227 SW30.2@103.551,11.225
NetD31_2: D31.2 SW31.2 | length 3
  Top Layer w0.254: D31.2@121.341,1.534 121.961,1.464 123.343,1.368 SW31.2@124.356,1.195
NetD32_2: D32.2 SW32.2 | length 2.8
  Top Layer w0.254: D32.2@142.065,-12.044 142.682,-12.133 143.798,-12.329 SW32.2@144.808,-12.496
NetD33_2: D33.2 SW33.2 | length 3
  Top Layer w0.254: SW33.2@164.391,-10.878 164.533,-10.017 164.801,-8.493 D33.2@164.886,-7.875
NetD34_2: D34.2 SW34.2 | length 2.8
  Top Layer w0.254: D34.2@62.66,-19.87 63.283,-19.877 64.462,-19.877 SW34.2@65.485,-19.9
NetD35_2: D35.2 SW35.2 | length 3.4
  Top Layer w0.254: D35.2@82.16,-17.97 82.16,-17.033 cw(c82.414,-17.033) 82.414,-16.779 83.478,-16.779 SW35.2@84.501,-16.848
NetD36_2: D36.2 SW36.2 | length 2.9
  Top Layer w0.254: D36.2@100.66,-7.87 101.283,-7.856 102.528,-7.856 SW36.2@103.551,-7.848
NetD37_2: D37.2 SW37.2 | length 6.1
  Top Layer w0.254: D37.2@120.079,-20.774 120.686,-21.019 122.609,-21.153 122.618,-21.154 122.732,-21.154 122.874,-21.012 123.035,-18.706 SW37.2@123.096,-17.835
NetD38_2: D38.2 SW38.2 | length 2.3
  Top Layer w0.254: D38.2@139.255,-30.996 139.87,-31.094 140.509,-31.207 SW38.2@141.521,-31.358
NetD39_2: D39.2 SW39.2 | length 2.9
  Top Layer w0.254: SW39.2@161.111,-29.678 161.324,-28.829 161.561,-27.485 D39.2@161.686,-26.875
NetD40_2: D40.2 SW40.2 | length 3.1
  Top Layer w0.254: D40.2@25.858,-66.272 25.858,-66.484 SW40.2@27.884,-68.51
NetD41_2: D41.2 SW41.2 | length 2.9
  Top Layer w0.254: D41.2@43.588,-50.92 43.811,-51.511 44.489,-52.686 SW41.2@44.887,-53.464
NetD42_2: D42.2 SW42.2 | length 3.2
  Top Layer w0.254: D42.2@62.1,-44.112 62.721,-44.024 64.227,-43.62 SW42.2@65.224,-43.39
NetD43_2: D43.2 SW43.2 | length 3.1
  Top Layer w0.254: D43.2@84.36,-38.77 84.983,-38.79 86.442,-38.79 SW43.2@87.465,-38.87
NetJP26_1: JP26.1 LED19.1 LED20.3 | length 14.7
  Top Layer w0.254: LED20.3@-13.985,-61.447 -13.511,-61.721 -12.387,-62.37 -12.319,-62.37 -10.807,-62.37 cw(c-10.807,-62.624) -10.682,-62.403 ; -10.682,-62.403 -8.309,-63.751 JP26.1@-8.277,-63.742 ; -8.04,-63.97 -4.21,-66.596 -4.174,-66.626 LED19.1@-1.569,-69.231
NetJP29_1: JP29.1 LED40.1 LED41.3 | length 15.1
  Top Layer w0.254: LED40.1@41.55,-70.292 41.881,-69.849 43.26,-68.47 43.997,-67.737 ; 44,-67.735 45.234,-66.903 47.66,-65.27 ; JP29.1@47.922,-65.198 47.931,-65.166 49.863,-64.027 ; 49.864,-64.027 ccw(c49.734,-63.808) 49.983,-63.861 50.537,-61.181 ; 50.537,-61.181 cw(c50.786,-61.233) 50.659,-61.013 51.681,-60.423 LED41.3@52.155,-60.148
NetLED1_1: LED1.1 LED2.3 | length 16.8
  Top Layer w0.254: LED2.3@-48.558,10.327 -48.54,10.309 v1(-48.54,7.63) ; v1(-41.94,8.93) -41.918,8.908 -35.009,8.908 LED1.1@-34.987,8.886
  Bottom Layer w0.254: v1(-48.54,7.63) -47.04,7.63 -45.784,8.886 -41.984,8.886 v1(-41.94,8.93)
NetLED1_3: LED1.3 LED6.1 | length 19.8
  Top Layer w0.254: LED6.1@-34.985,-10.208 -34.979,-10.202 -34.979,-4.409 -29.537,1.033 LED1.3@-29.537,7.386
NetLED2_1: LED2.1 LED7.3 | length 46.3
  Top Layer w0.254: LED2.1@-54.008,11.827 -59.391,11.827 -59.54,11.678 -59.54,8.43 -59.04,7.93 -51.04,7.93 -50.145,7.035 -50.145,2.525 -54.04,-1.37 -54.04,-5.17 -53.54,-5.67 -46.34,-5.67 -45.84,-6.17 -45.84,-8.37 -46.223,-8.753 LED7.3@-48.548,-8.753
NetLED3_1: LED3.1 LED4.3 | length 30.6
  Top Layer w0.254: LED4.3@-94.521,10.189 -94.346,10.485 -94.423,11.583 ; -94.423,11.584 cw(c-94.169,11.6) -94.193,11.853 v1(-87.04,12.53) ; v1(-77.04,16.53) -77.04,19.73 -75.963,20.807 LED3.1@-73.048,20.807
  Bottom Layer w0.254: v1(-87.04,12.53) -77.193,12.627 ccw(c-77.196,12.881) -76.942,12.883 -76.947,13.571 v1@-77.034,16.571
NetLED3_3: LED3.3 LED8.1 | length 20.5
  Top Layer w0.254: LED8.1@-73.034,1.802 -73.04,2.085 -73.04,7.888 cw(c-72.786,7.888) -72.92,8.104 -67.661,11.355 ; -67.661,11.355 ccw(c-67.795,11.571) -67.541,11.571 -67.541,19.024 LED3.3@-67.598,19.307
NetLED4_1: LED4.1 LED9.3 | length 33.9
  Top Layer w0.254: LED4.1@-88.98,9.073 -88.96,8.791 -88.606,3.73 ; -88.606,3.725 -88.352,0.68 cw(c-88.606,0.659) -88.465,0.447 -93.654,-2.985 ccw(c-93.476,-3.166) -93.729,-3.19 -93.361,-7.053 -93.352,-7.144 -93.213,-7.283 -93.097,-7.283 -85.411,-6.602 -85.406,-6.601 -84.975,-6.581 cw(c-84.963,-6.835) -84.711,-6.803 -84.442,-8.954 cw(c-84.694,-8.986) -84.44,-8.986 -84.44,-9.249 -84.673,-9.653 cw(c-84.893,-9.526) -84.875,-9.779 -87.069,-9.933 LED9.3@-87.62,-9.907
NetLED5_1: LED5.1 LED11.3 | length 27.4
  Top Layer w0.254: LED11.3@-126.482,-22.148 -125.951,-22.007 v1(-124.04,-21.67) ; v1(-118.239,-4.975) -116.387,-4.648 LED5.1@-115.85,-4.537
  Bottom Layer w0.254: -124.717,-18.285 cw(c-124.468,-18.236) -124.666,-18.078 -122.797,-15.741 ; -124.717,-18.286 v1(-124.04,-21.67) ; -122.796,-15.74 cw(c-122.599,-15.9) -122.651,-15.651 -118.167,-14.716 ccw(c-118.219,-14.468) -117.969,-14.423 -119.596,-5.513 cw(c-119.346,-5.468) -119.398,-5.219 -118.929,-5.12 v1(-118.239,-4.975)
NetLED5_3: LED5.3 LED10.1 | length 20.2
  Top Layer w0.254: -113.57,-17.075 -109.03,-12.462 ccw(c-109.212,-12.284) -108.961,-12.243 ; -113.571,-17.072 -112.535,-22.948 LED10.1@-112.527,-23.234 ; LED5.3@-110.222,-5.068 -110.138,-5.34 -109.78,-7.374 ; -109.779,-7.377 -108.961,-12.242
NetLED6_3: LED6.3 LED12.1 | length 19.9
  Top Layer w0.254: LED12.1@-34.968,-29.323 -34.94,-29.295 -34.94,-23.47 -29.535,-18.065 LED6.3@-29.535,-11.708
NetLED7_1: LED7.1 LED13.3 | length 43
  Top Layer w0.254: LED7.1@-53.998,-7.253 -56.623,-7.253 -57.34,-7.97 -57.34,-13.17 -56.94,-13.57 -50.44,-13.57 -50.24,-13.77 -50.24,-16.57 -54.04,-20.37 -54.04,-24.07 -53.44,-24.67 -45.74,-24.67 -45.24,-25.17 -45.24,-27.47 -45.541,-27.771 LED13.3@-48.534,-27.771
NetLED8_3: LED8.3 LED14.1 | length 20.5
  Top Layer w0.254: LED14.1@-73.034,-17.271 -73.04,-16.988 -73.04,-11.009 -72.965,-10.935 -72.948,-10.917 -67.632,-7.341 -67.614,-7.323 -67.54,-7.249 -67.54,0.019 LED8.3@-67.584,0.302
NetLED9_1: LED9.1 LED15.3 | length 43.4
  Top Layer w0.254: -95.185,-8.952 ccw(c-95.166,-9.205) -95.419,-9.226 -94.953,-15.005 -94.946,-15.098 -94.805,-15.238 -94.687,-15.238 -89.471,-14.689 -89.353,-14.689 -89.214,-14.828 -89.205,-14.918 -88.757,-19.396 cw(c-89.01,-19.421) -88.897,-19.648 -92.285,-21.342 -92.322,-21.361 -92.425,-21.464 -92.425,-21.577 -92.15,-26.08 -92.007,-26.222 -91.893,-26.222 -91.884,-26.221 -83.282,-25.614 -83.273,-25.613 -83.159,-25.613 -83.017,-25.755 -82.83,-28.459 -82.83,-28.573 -82.972,-28.715 -83.067,-28.721 -85.812,-28.913 LED15.3@-86.36,-28.937 ; -95.184,-8.952 -93.707,-8.849 LED9.1@-93.161,-8.791
NetLED10_3: LED10.3 LED16.1 | length 20.4
  Top Layer w0.254: -110.352,-36.075 ccw(c-110.165,-36.247) -110.415,-36.291 -109.436,-41.844 LED16.1@-109.24,-42.097 ; -110.352,-36.075 -105.725,-31.062 ccw(c-105.912,-30.89) -105.662,-30.846 -106.861,-24.046 LED10.3@-106.899,-23.765
NetLED11_1: LED11.1 LED17.3 | length 43.6
  Top Layer w0.254: LED11.1@-132.11,-21.617 -132.653,-21.69 -135.686,-22.225 ccw(c-135.642,-22.475) -135.891,-22.523 -134.987,-27.223 ccw(c-134.738,-27.175) -134.694,-27.426 -129.09,-26.415 ; -129.585,-38.71 -130.413,-33.925 cw(c-130.163,-33.882) -130.314,-33.678 -130.313,-33.677 -127.968,-31.963 ccw(c-128.118,-31.759) -127.868,-31.714 ; -129.585,-38.711 ccw(c-129.335,-38.666) -129.283,-38.915 -121.637,-37.284 -121.194,-37.212 ; -129.089,-26.415 cw(c-129.045,-26.665) -128.795,-26.62 -127.868,-31.713 ; LED17.3@-123.202,-40.948 -122.662,-40.853 -121.739,-40.69 -120.676,-40.428 ccw(c-120.737,-40.181) -120.487,-40.133 ; -121.193,-37.211 cw(c-121.153,-37.462) -120.902,-37.424 -120.541,-39.864 ; -120.541,-39.865 ccw(c-120.29,-39.826) -120.539,-39.876 -120.488,-40.132
NetLED12_3: LED12.3 LED21.1 | length 40.6
  Top Layer w0.254: LED21.1@-36.86,-50.317 -36.786,-50.043 -36.597,-49.336 ; -36.599,-49.343 -36.047,-48.896 -35.977,-48.839 -35.852,-48.839 -31.755,-50.003 -23.476,-49.944 ; v1(-29.54,-33.97) -29.54,-30.845 LED12.3@-29.518,-30.823 ; -23.472,-49.939 -22.887,-49.135 ; -22.887,-49.134 ccw(c-23.093,-48.986) -22.839,-48.989 -22.742,-42.438 v1(-22.742,-33.972)
  Bottom Layer w0.254: v1(-29.54,-33.97) -29.538,-33.972 v1(-22.742,-33.972)
NetLED13_1: LED13.1 LED22.3 | length 66.3
  Top Layer w0.254: v1(-62.34,-29.07) -62.34,-30.47 -60.24,-32.57 -46.34,-32.57 -44.84,-34.07 -44.84,-37.47 -46.54,-39.17 -53.64,-39.17 -57.04,-42.57 -57.04,-45.77 -56.14,-46.67 -48.94,-46.67 -48.44,-47.17 -48.44,-49.47 -48.75,-49.78 LED22.3@-51.472,-49.78 ; v1(-57.34,-26.17) -57.29,-26.22 -54.035,-26.22 LED13.1@-53.984,-26.271
  Bottom Layer w0.254: v1(-62.34,-29.07) -62.34,-27.77 -60.74,-26.17 v1(-57.34,-26.17)
NetLED14_3: LED14.3 LED22.1 | length 38.1
  Top Layer w0.254: LED14.3@-67.584,-18.771 -67.588,-19.054 -67.588,-22.622 v1(-67.54,-22.67) ; v1(-61.04,-48.27) -61.035,-48.275 -56.927,-48.275 LED22.1@-56.922,-48.28
  Bottom Layer w0.254: v1(-67.54,-22.67) -67.54,-36.87 -66.54,-37.87 -63.54,-37.87 -61.04,-40.37 v1(-61.04,-48.27)
NetLED15_1: LED15.1 LED16.3 | length 24
  Top Layer w0.254: LED16.3@-103.612,-42.628 -103.062,-42.591 -99.672,-41.993 ; -99.671,-41.993 ccw(c-99.716,-41.743) -99.485,-41.848 v1(-97.04,-36.47) ; v1(-97.04,-27.77) -97.005,-27.805 -91.918,-27.805 LED15.1@-91.901,-27.821
  Bottom Layer w0.254: v1(-97.04,-36.47) v1(-97.04,-27.77)
NetLED20_1: LED20.1 LED21.3 | length 14.9
  Top Layer w0.254: LED21.3@-31.984,-53.176 -31.446,-53.286 -25.751,-54.812 -22.269,-54.92 -19.533,-56.499 -18.424,-57.139 LED20.1@-17.955,-57.423
NetLED23_1: LED23.1 LED24.3 | length 17.6
  Top Layer w0.254: LED23.1@73.928,7.347 73.937,7.339 75.017,7.339 76.152,7.338 v1(76.16,7.33) ; v1(79.86,11.73) 79.909,11.779 87.332,11.779 87.381,11.73 LED24.3@87.478,11.827
  Bottom Layer w0.254: v1(76.16,7.33) 77.404,7.33 79.06,7.33 79.86,8.13 v1(79.86,11.73)
NetLED23_3: LED23.3 LED28.1 | length 44.2
  Top Layer w0.254: LED23.3@68.478,8.847 65.009,8.847 64.272,8.287 64.259,8.277 64.175,8.193 64.12,6.079 64.12,5.97 65.865,4.225 71.411,4.225 71.56,4.076 71.56,-1.836 cw(c71.306,-1.836) 71.451,-2.045 68.47,-4.094 ccw(c68.614,-4.304) 68.36,-4.304 68.36,-8.419 ccw(c68.614,-8.419) 68.611,-8.673 77.009,-8.772 77.111,-8.775 77.26,-8.924 77.26,-9.026 77.26,-11.521 77.111,-11.67 74.453,-11.67 LED28.1@73.905,-11.708
NetLED24_1: LED24.1 LED29.3 | length 20.4
  Top Layer w0.254: LED29.3@87.468,-7.253 87.46,-6.97 87.46,-1.303 cw(c87.714,-1.303) 87.57,-1.094 92.85,2.554 ; 92.851,2.554 ccw(c92.705,2.763) 92.959,2.763 92.959,10.044 LED24.1@92.928,10.327
NetLED25_1: LED25.1 LED26.3 | length 20.3
  Top Layer w0.254: v1(111.96,17.13) 111.96,19.024 LED25.1@111.968,19.307 ; v1(124.36,10.83) 127.458,10.613 LED26.3@128.005,10.569
  Bottom Layer w0.254: v1(111.96,17.13) 114.26,17.13 114.291,17.099 122.355,10.95 122.433,10.945 v1(124.36,10.83)